# EAGLE board TCS3200_board (EAGLE 9.1.2)
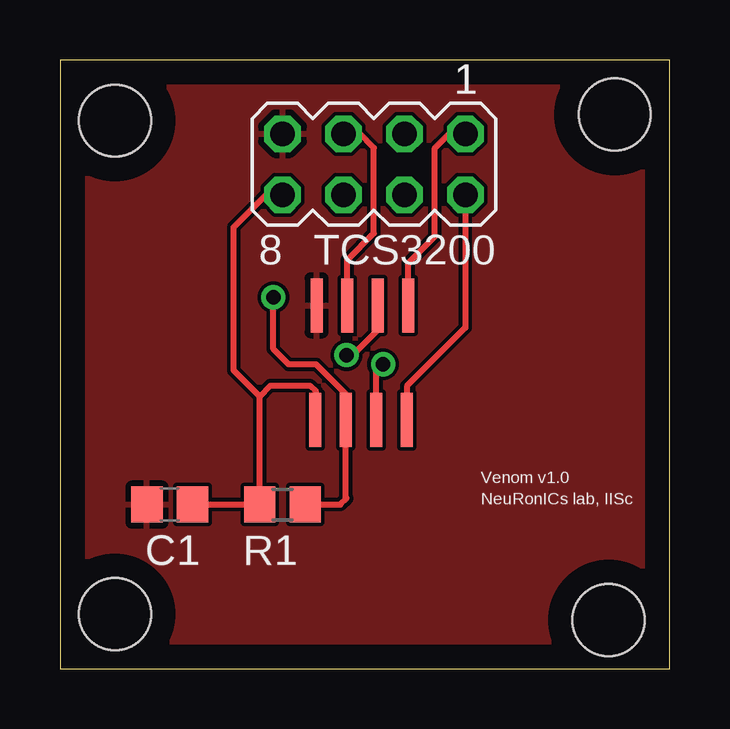
[diagram p0: board, top side]
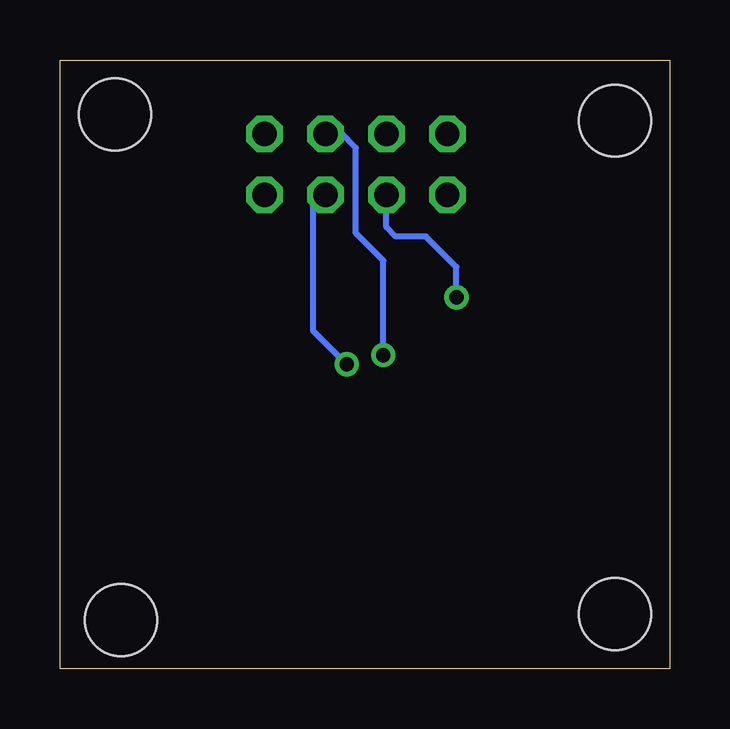
[diagram p1: board, bottom side, seen from below]

Size 25.41 x 25.39 mm. Coordinates in mm from the lower left corner, seen from the top.
Outline: 0,0 25.41,0 25.41,25.39 0,25.39 0,0
Copper layers (1*16): Top 0.035mm / dielectric 1.5mm / Bottom 0.035mm
Design rules "default": minimum track width 6mil, minimum drill 0.35mm, track to track 6mil, track to pad 6mil, pad to pad 6mil, via to via 6mil, smd to smd 6mil, copper to edge 40mil, drill to drill 6mil, minimum pad ring 10mil, minimum via ring 8mil, stop-mask expansion 4mil, vias tented up to drill 0mil, thermal gap 10mil
Holes 3 mm at 2.29,22.86 23.11,23.11 22.86,2.03 2.29,2.29

## Footprints (pad centres in the part's own frame; a part is rotated, then mirrored left to right if it is on the bottom)
C0805 = smd 1.3 x 1.5: 1 -0.95,0; 2 0.95,0
R0805 = smd 1.3 x 1.5: 1 -0.95,0; 2 0.95,0
MA04-2 = drill 1.016 octagon: 1 -3.81,-1.27; 2 -3.81,1.27; 3 -1.27,-1.27; 4 -1.27,1.27; 5 1.27,-1.27; 6 1.27,1.27; 7 3.81,-1.27; 8 3.81,1.27
TCS3200 = smd 0.5 x 2.25: 1 -1.93,-2.33; 2 -0.66,-2.33; 3 0.61,-2.33; 4 1.88,-2.33; 5 1.93,2.45; 6 0.66,2.45; 7 -0.61,2.45; 8 -1.88,2.45

## Placement (x,y rotation side)
C1  0.1uF  [C0805]  4.57,6.86 180 top
R1  10K  [R0805]  9.27,6.86 180 top
TCS3200  [MA04-2]  13.08,21.04 180 top
U$1  TCS3200  [TCS3200]  12.57,12.83 180 top

## Library data of the parts
C1 = rcl; SPICEPREFIX: C
R1 = rcl; SPICEPREFIX: R
TCS3200 = con-lstb; OC_FARNELL: unknown; OC_NEWARK: unknown
U$1 = TCS3200

## Nets
GND: C1.2 TCS3200.7 U$1.4
OUT: R1.1 TCS3200.6 U$1.6
S0: TCS3200.1 U$1.1
S1: TCS3200.3 U$1.2
S2: TCS3200.4 U$1.7
S3: TCS3200.2 U$1.8
VDD: C1.1 R1.2 TCS3200.8 U$1.5
~OE: TCS3200.5 U$1.3

## Tracks (layer width: path | path; a pad name or v marks a point on that pad's centre or on a via)
GND
  pour Top: 0,0 0,25.4 25.4,25.4 25.4,0
OUT  (via drill 0.6)
  Top 0.254: R1.1 11.68,6.86 11.94,7.11 11.91,7.14 U$1.6 11.94,10.4 11.94,11.43 10.67,12.7 9.53,12.7 8.89,13.34 v8.89,15.49
  Bottom 0.254: v8.89,15.49 8.89,16.76 10.16,18.03 11.43,18.03 11.81,18.41 TCS3200.6
S0
  Top 0.254: U$1.1 14.5,16.92 15.62,18.03 15.62,21.72 16.21,22.31 TCS3200.1
S1  (via drill 0.6 pad 1)
  Top 0.254: U$1.2 13.23,14.12 12.19,13.08 v11.94,13.08
  Bottom 0.254: TCS3200.3 13.76,22.31 13.72,22.35 13.08,21.72 13.08,18.16 11.94,17.02 v11.94,13.08
S2  (via drill 0.6 pad 1)
  Top 0.254: U$1.7 13.18,12.42 v13.46,12.7
  Bottom 0.254: TCS3200.4 14.52,19.77 14.86,19.43 14.86,14.1 v13.46,12.7
S3
  Top 0.254: TCS3200.2 16.89,14.22 14.45,11.79 U$1.8
VDD
  Top 0.254: C1.1 R1.2 8.32,11.37 | 8.32,11.37 8.76,11.81 10.41,11.81 10.67,11.56 10.64,11.53 U$1.5 | 8.32,11.37 7.24,12.45 7.24,18.41 8.59,19.77 TCS3200.8
~OE
  Top 0.254: U$1.3 11.96,17.04 13.08,18.16 13.08,21.72 12.45,22.35 12.4,22.31 TCS3200.5

## Text on the board
tNames: Venom v1.0 | NeuRonICs lab, IISc